# Altium PCB Adafruit Feather M0 Adalogger.PcbDoc
Units mil, origin at the board's own origin, x right, y up, seen from the top; angles counter-clockwise.
Board outline 2825 x 1585 mil, 2 copper layers (Top, Bottom); 17 components, 22 nets, 73 pads, 6 vias.
Unrouted connection lines stored in the file: 6.
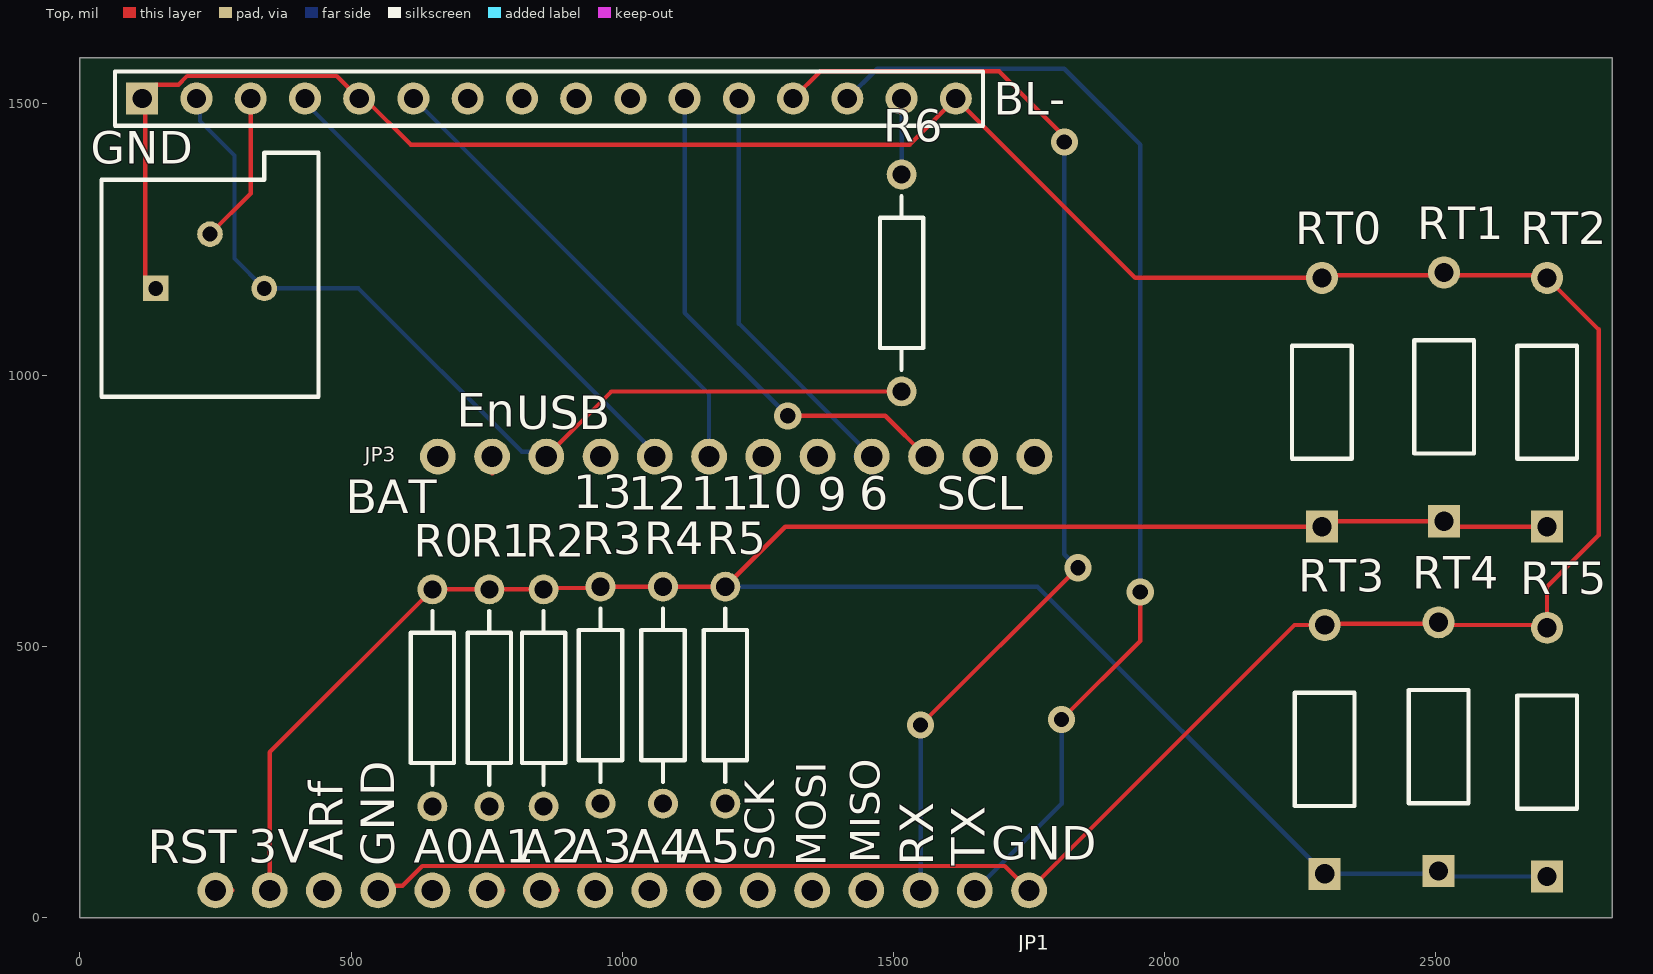
[diagram p0: Top view]
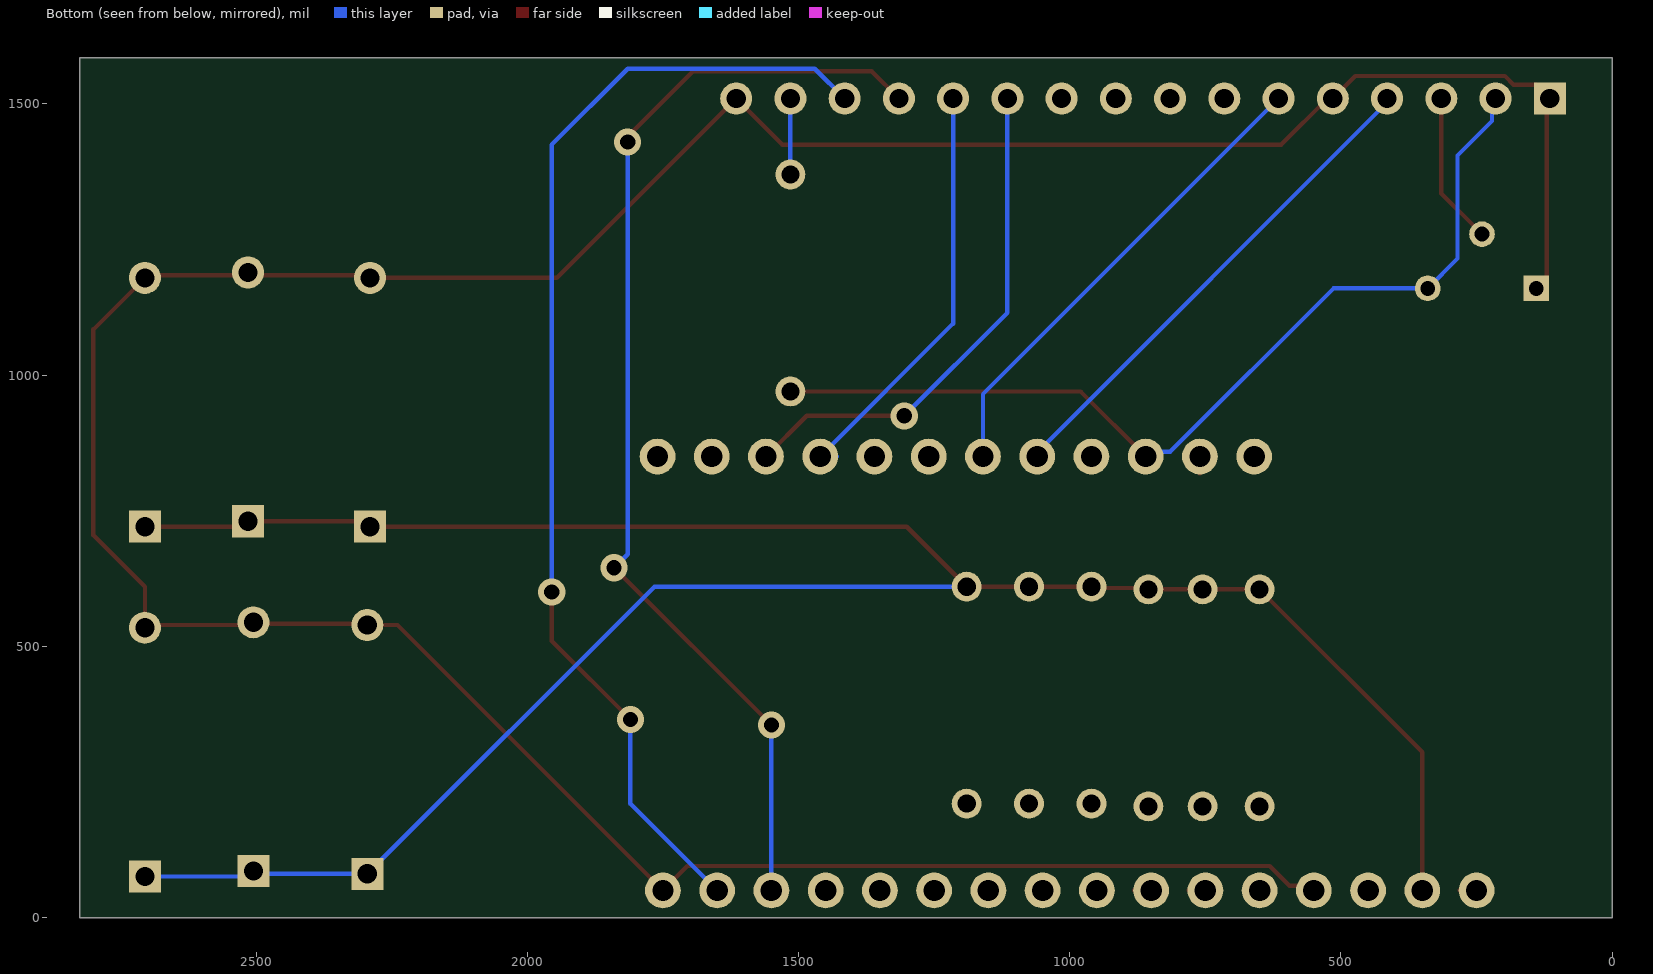
[diagram p1: Bottom view, seen from below]

## Layer stack, top to bottom
Top Solder: solder mask 0.4, Solder Resist, Dk 3.5
Top: signal copper 1.378
Dielectric 1: dielectric 12.6, FR-4, Dk 4.8
Bottom: signal copper 1.378
Bottom Solder: solder mask 0.4, Solder Resist, Dk 3.5

## Board outline
0,0 2825,0 2825,1585 0,1585

## Design rules (kind name [scope] priority, off if disabled: settings)
BoardOutlineClearance mdCopperDimension [All] p1: gap=10 ignorepadtopadclearanceinfootprint=FALSE except(0: Arc-SplitContinuation Track-SplitContinuation SMDPad-SplitContinuation THPad-SplitContinuation Via-SplitContinuation Fill-SplitContinuation Poly-SplitContinuation Region-SplitContinuation Text-SplitContinuation)
Clearance "Clearance (Same Net)" [All] p1: gap=8 ignorepadtopadclearanceinfootprint=FALSE
Clearance [All] p2: gap=8 ignorepadtopadclearanceinfootprint=FALSE except(0: Arc-Poly Track-Poly SMDPad-Poly THPad-Poly Via-Poly Fill-Poly Poly-Poly Poly-Region Poly-Text; 10: Poly-Hole)
HoleSize [All] p1: absolutevalues=TRUE maxlimit=100000 minlimit=15.5 maxpercent=80.000 minpercent=20.000
HoleToHoleClearance mdDrill [All] p1: gap=8 allowstackedmicrovias=TRUE
PasteMaskExpansion Expansion_SMDPaste_OFF [InPadClass('SMDPaste_OFF')] p1: expansion=0
PasteMaskExpansion mlMinCreamFrame [All] p2: expansion=0
PolygonConnect PolygonConnect_For_PolygonThermal_ON_Width100000_Gap100000 [InPolygonClass('PolygonThermal_ON_Width100000_Gap100000') vs Not IsVia] p1: connectstyle=Relief reliefconductorwidth=10 reliefentries=4 polygonreliefangle="90 Angle" airgapwidth=10
PolygonConnect ThermalVias [IsVia] p2: connectstyle=Direct reliefconductorwidth=10 reliefentries=4 polygonreliefangle="90 Angle" airgapwidth=10
PolygonConnect [All] p3: connectstyle=Relief reliefconductorwidth=10 reliefentries=4 polygonreliefangle="90 Angle" airgapwidth=10
RoutingVias [All] p1: holewidth=15.5 width=31.5 viastyle="Through Hole" minholewidth=15.5 minwidth=31.5 maxholewidth=100 maxwidth=100
SolderMaskExpansion Expansion_SMDSolder_OFF [InPadClass('SMDSolder_OFF')] p1: expansion=0
SolderMaskExpansion mlMinStopFrame [All] p2: expansion=2
Width [All] p1: maxlimit=10000 minlimit=8 preferedwidth=8
27 further rules are at their usual default settings.

## Components (designator, comment, footprint, x,y, rotation, side; value= is the part's Value field where it differs from the comment)
BL- "Header 16" HDR1X16 115,1510 r0 top (schematic designator PD)
GND "RPot" VR4 240,1210 r0 top value=1K (schematic designator RPot)
JP1 "HEADER-1X16ROUND" 1X16_ROUND 1000,50 r180 top
JP3 "HEADER-1X12" 1X12_ROUND 1210,850 r0 top
R0 "" AXIAL-0.4 650,405 r270 top value=10K
R1 "" AXIAL-0.4 755,405 r270 top value=10K
R2 "" AXIAL-0.4 855,405 r270 top value=10K
R3 "" AXIAL-0.4 960,410 r270 top value=10K
R4 "" AXIAL-0.4 1075,410 r270 top value=10K
R5 "" AXIAL-0.4 1190,410 r270 top value=10K
R6 "" AXIAL-0.4 1515,1170 r90 top value=100
RT0 "Res Thermal" PIN-W2/E2.8 2290,950 r90 top
RT1 "Res Thermal" PIN-W2/E2.8 2515,960 r90 top
RT2 "Res Thermal" PIN-W2/E2.8 2705,950 r90 top
RT3 "Res Thermal" PIN-W2/E2.8 2295,310 r90 top
RT4 "Res Thermal" PIN-W2/E2.8 2505,315 r90 top
RT5 "Res Thermal" PIN-W2/E2.8 2705,305 r90 top

## Footprints (in the part's own frame and the unit in brackets; to place one, negate y for a bottom-side part, rotate by r counter-clockwise, add the part's x,y. Pads: shape width x height; smd on the part's side, far side on the other; paste and mask are expansions set on the pad)
1X12_ROUND [mil] "1X12_ROUND"
  round 66 / inner round 60 / far side round 66 hole 39.37: 1(-550,0) 2(-450,0) 3(-350,0) 4(-250,0) 5(-150,0) 6(-50,0) 7(50,0) 8(150,0) 9(250,0) 10(350,0) 11(450,0) 12(550,0)
1X16_ROUND [mil] "1X16_ROUND"
  round 66 / inner round 60 / far side round 66 hole 39.37: 1(-750,0) 2(-650,0) 3(-550,0) 4(-450,0) 5(-350,0) 6(-250,0) 7(-150,0) 8(-50,0) 9(50,0) 10(150,0) 11(250,0) 12(350,0) 13(450,0) 14(550,0) 15(650,0) 16(750,0)
AXIAL-0.4 [mm] "Axial Device, Thru-Hole; 2 Leads; 0.4 in Pin Spacing"
  round 1.4 hole 0.85: 1(-5.08,0) 2(5.08,0)
  silkscreen extent -4.06,-1.02 4.06,1.02
HDR1X16 [mm] "Connector; Header; 16 Position"
  rect 1.5x1.5 hole 0.9: 1(0,0)
  round 1.5 hole 0.9: 2(2.54,0) 3(5.08,0) 4(7.62,0) 5(10.16,0) 6(12.7,0) 7(15.24,0) 8(17.78,0) 9(20.32,0) 10(22.86,0) 11(25.4,0) 12(27.94,0) 13(30.48,0) 14(33.02,0) 15(35.56,0) 16(38.1,0)
  silkscreen extent -1.27,-1.27 39.37,1.27
PIN-W2/E2.8 [mm] "Thru-Hole; 2 Leads"
  rect 1.5x1.5 hole 0.9: 1(-5.825,0)
  round 1.5 hole 0.9: 2(5.825,0)
  silkscreen extent -2.65,-1.4 2.65,1.4
VR4 [mm] "Thru-Hole; 3 Leads"
  rect 1.2x1.2 hole 0.7: 1(-2.54,-1.27)
  round 1.2 hole 0.7: 2(0,1.27) 3(2.54,-1.27)
  silkscreen extent -5.08,-6.35 5.08,5.08

## Part data
BL-: "Header, 16-Pin", LatestRevisionDate=17-Jul-2002, LatestRevisionNote="Re-released for DXP Platform.", Publisher="Altium Limited"
GND: "Potentiometer", LatestRevisionDate=17-Jul-2002, LatestRevisionNote="Re-released for DXP Platform.", PackageDescription="Variable Resistor, Thru-Hole; 3 Leads", PackageReference=VR5, Published=8-Jun-2000, Publisher="Altium Limited", Set Position=0.5, Sim Note="Enter the Resistance value and the set point into parameter fields."
JP1: "PIN HEADER", DeviceName=ROUND, DeviceSetName=HEADER-1X16, GateName_1=A, LibraryName=microbuilder, SymbolName_1=PINHD16
R0 R1 R2 R3 R4 R5 R6: library part Res2, "Resistor", LatestRevisionDate=17-Jul-2002, LatestRevisionNote="Re-released for DXP Platform.", PackageDescription="Axial Device, Thru-Hole; 2 Leads; 0.4 in Pin Spacing", PackageReference=AXIAL-0.4, Published=8-Jun-2000, Publisher="Altium Limited"
RT0 RT1 RT2 RT3 RT4 RT5: "Thermistor", Code_IPC=RESC2012, LatestRevisionDate=29-May-2009, LatestRevisionNote="IPC-7351 Footprint Added.", PackageDescription="Chip Resistor 0805 Case Size", PackageReference=6-0805, PackageVersion=Mar-2003, Published=24-Mar-1999, Publisher="Altium Limited"
JP3: DeviceSetName=HEADER-1X12, GateName_1=G$1, LibraryName=microbuilder, SymbolName_1=PINHD12

## Via types
v1: diameter 50, hole 28, Top to Bottom, 6 vias

## Nets (pads, with @x,y where several pads share a name; then routed paths per layer and width w, separated by ;. In a path a pad name is that pad's centre, name@x,y a point inside that pad or via, vN(x,y) a via of type N, cw(c..) or ccw(c..) an arc to the next point about the centre after c; other vN are vias at no path point)
+3V3: JP1.15 R0.1 R1.1 R2.1 R3.1 R4.1 R5.1 RT0.1 RT1.1 RT2.1 RT3.1 RT4.1 RT5.1 | length 4530.9
  Top w8: JP1.15 350,305 R0.1 R1.1 R2.1 857.5,607.5 957.5,607.5 R3.1 R4.1 R5.1 1300.67,720.67 RT0.1 2300,730.67 RT1.1 2525,720.67 RT2.1
  Bottom w8: R5.1 1765.67,610 RT3.1 2500,80.67 RT4.1 2515,75.67 RT5.1
A0: JP1.12 R0.2
A1: JP1.11 R1.2 | length 30
  Top w10: JP1.11 JP1.11@780,50
A2: JP1.10 R2.2 | length 40
  Top w10: JP1.10@860,50 JP1.10 JP1.10@880,50
A3: JP1.9 R3.2
A4: JP1.8 R4.2
A5: JP1.7 R5.2 | length 15
  Bottom w10: JP1.7@1135,50 JP1.7
D9: JP3.8 | length 15
  Top w10: JP3.8@1350,850 JP3.8
  Bottom w10: JP3.8@1360,845 JP3.8
D10: JP3.7 | length 7.1
  Bottom w10: JP3.7@1255,845 JP3.7
D13: JP3.4 | length 20
  Bottom w10: JP3.4@940,850 JP3.4
DB4: BL-.11 JP3.10 | length 969.8
  Top w8: v1(1305,925) 1485,925 JP3.10
  Top w10: JP3.10@1560,830 JP3.10
  Bottom w8: BL-.11 1115,1115 v1(1305,925)
DB5: BL-.12 JP3.9 | length 791.5
  Bottom w8: BL-.12 1215,1095 JP3.9
  Bottom w10: JP3.9@1430,850 JP3.9
DB6: BL-.13 JP1.3 | length 2088
  Top w8: BL-.13 1365,1560 1695,1560 v1@1820,1435 ; v1(1550,355) v1(1840,645)
  Bottom w8: JP1.3 v1(1550,355) ; v1(1815,1430) 1815,670 v1(1840,645)
DB7: BL-.14 JP1.2 | length 2122.1
  Top w8: v1(1810,365) 1955,510 v1(1955,600)
  Bottom w8: BL-.14 1470,1565 1815,1565 1955,1425 v1(1955,600) ; JP1.2 1810,210 v1(1810,365)
EN: BL-.6 JP3.6 | length 885.7
  Bottom w8: BL-.6 1160,965 JP3.6
GND: BL-.1 BL-.5 BL-.16 GND.1 JP1.1 JP1.13 RT0.2 RT1.2 RT2.2 RT3.2 RT4.2 RT5.2 | length 6325.3
  Top w8: GND.1 120.38,1179.62 120.38,1504.62 BL-.1 140.53,1535.53 181.8,1535.53 197.8,1551.53 473.47,1551.53 BL-.5 525,1510 610,1425 1530,1425 BL-.16 1945.67,1179.33 RT0.2 2295,1184.33 2510,1184.33 RT1.2 2520,1184.33 2700,1184.33 RT2.2 2800,1084.33 2800,705 2705,610 RT5.2 2700,539.33 2510,539.33 RT4.2 2502.5,541.83 2297.5,541.83 RT3.2 2239.33,539.33 JP1.1 1705,95 631.36,95 595,58.64 558.64,58.64 JP1.13
NetPD_15: BL-.15 R6.2 | length 140
  Bottom w8: R6.2 BL-.15
RS: BL-.4 JP3.5 | length 927.2
  Bottom w8: BL-.4 415,1502.5 1060,857.5 JP3.5
SCL: JP3.11 | length 25
  Bottom w10: JP3.11@1635,850 JP3.11
SDA: JP3.12
V0: BL-.3 GND.2 | length 289.8
  Top w8: GND.2 315,1335 BL-.3
  Bottom w8: BL-.3@315,1501.27 BL-.3
VBUS: BL-.2 GND.3 JP3.3 R6.1 | length 1754.9
  Top w8: JP3.3 980,970 R6.1
  Bottom w8: BL-.2 221.53,1503.47 221.53,1468.47 285,1405 285,1215 GND.3 513.64,1160 815,858.64 851.36,858.64 JP3.3
pads on no net: BL-.7 BL-.8 BL-.9 BL-.10 JP1.4 JP1.5 JP1.6 JP1.14 JP1.16 JP3.1 JP3.2
copper on no net: | length 145
  Top w10: 255,50 250,50 280,50 ; 760,820 760,850 ; 1350,50 1370,50 ; 1450,50 1450,75
  Bottom w10: 450,65 450,50 450,70

## Silkscreen, mask and mechanical layers (free items; w line width, h text height)
Top Overlay:
  text "En" at 695,905 h62
  text "USB" at 805,900 h62
  text "13" at 910,755 h62
  text "10" at 1225,755 h62
  text "12" at 1010.96,751.45 h62
  text "11" at 1126.29,751.45 h62
  text "6" at 1436.78,751.45 h62
  text "SCL" at 1579.8,751.45 h62
  text "9" at 1360,750 h62
  text "BAT" at 490,745 h62
  text "GND" at 1679.92,106.57 h62
  text "ARf" at 485,105 h62 r90
  text "SCK" at 1280,105 h54.25 r90
  text "3V" at 310.79,101.45 h62
  text "A0" at 615.79,101.45 h62
  text "A1" at 726.12,101.45 h62
  text "A2" at 810.79,101.45 h62
  text "A3" at 905.79,101.45 h62
  text "A4" at 1010.79,101.45 h62
  text "A5" at 1105.79,101.45 h62
  text "RST" at 125,100 h62
  text "MISO" at 1475,100 h54.25 r90
  text "RX" at 1573.55,95.79 h62 r90
  text "TX" at 1668.55,95.79 h62 r90
  text "GND" at 580,95 h62 r90
  text "MOSI" at 1375,95 h54.25 r90
Dimension:
  the board outline again, w4